# EAGLE board ultimate_Co-Op_v1_0 (EAGLE 7.4.0)
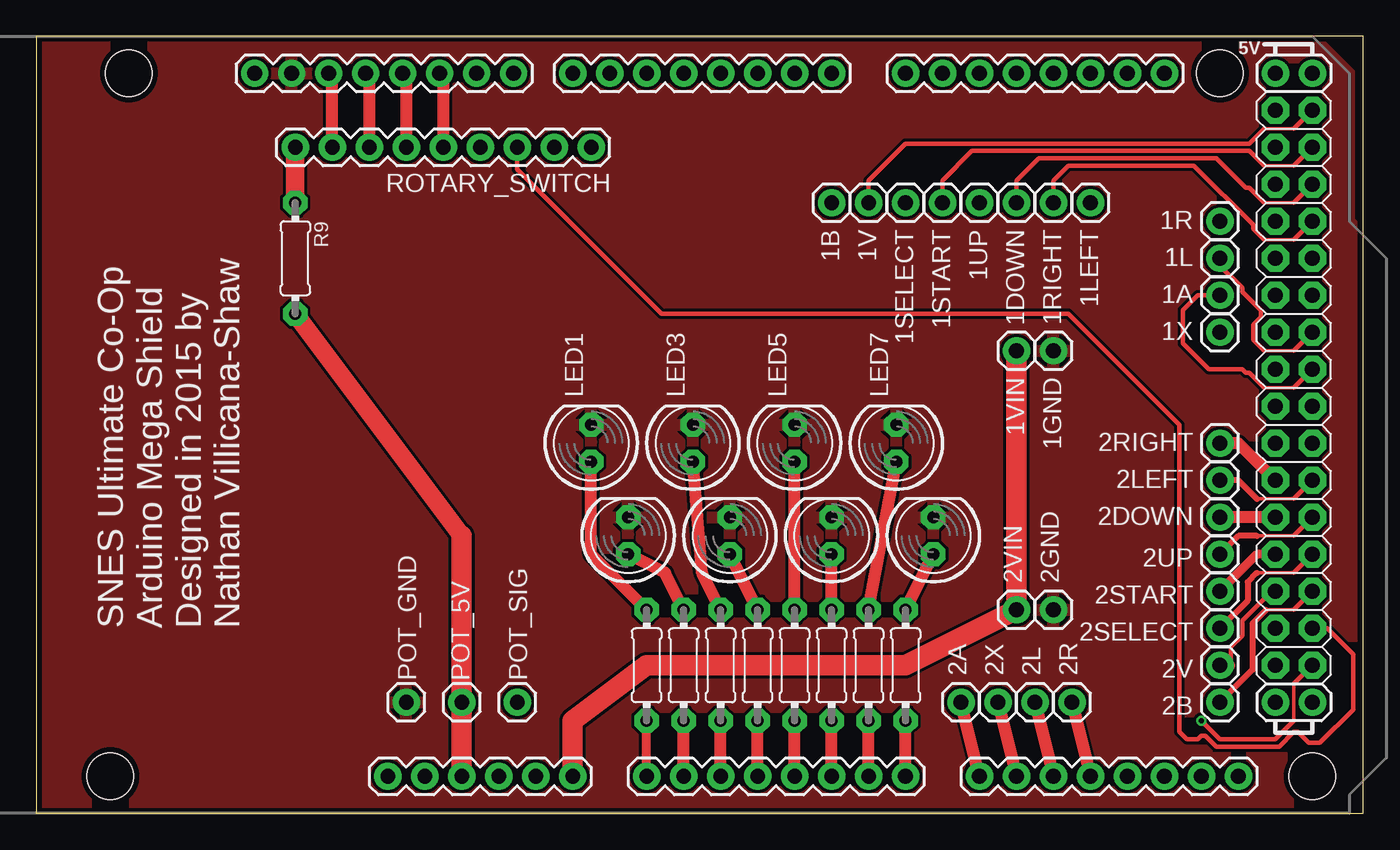
[diagram p0: board, top side]
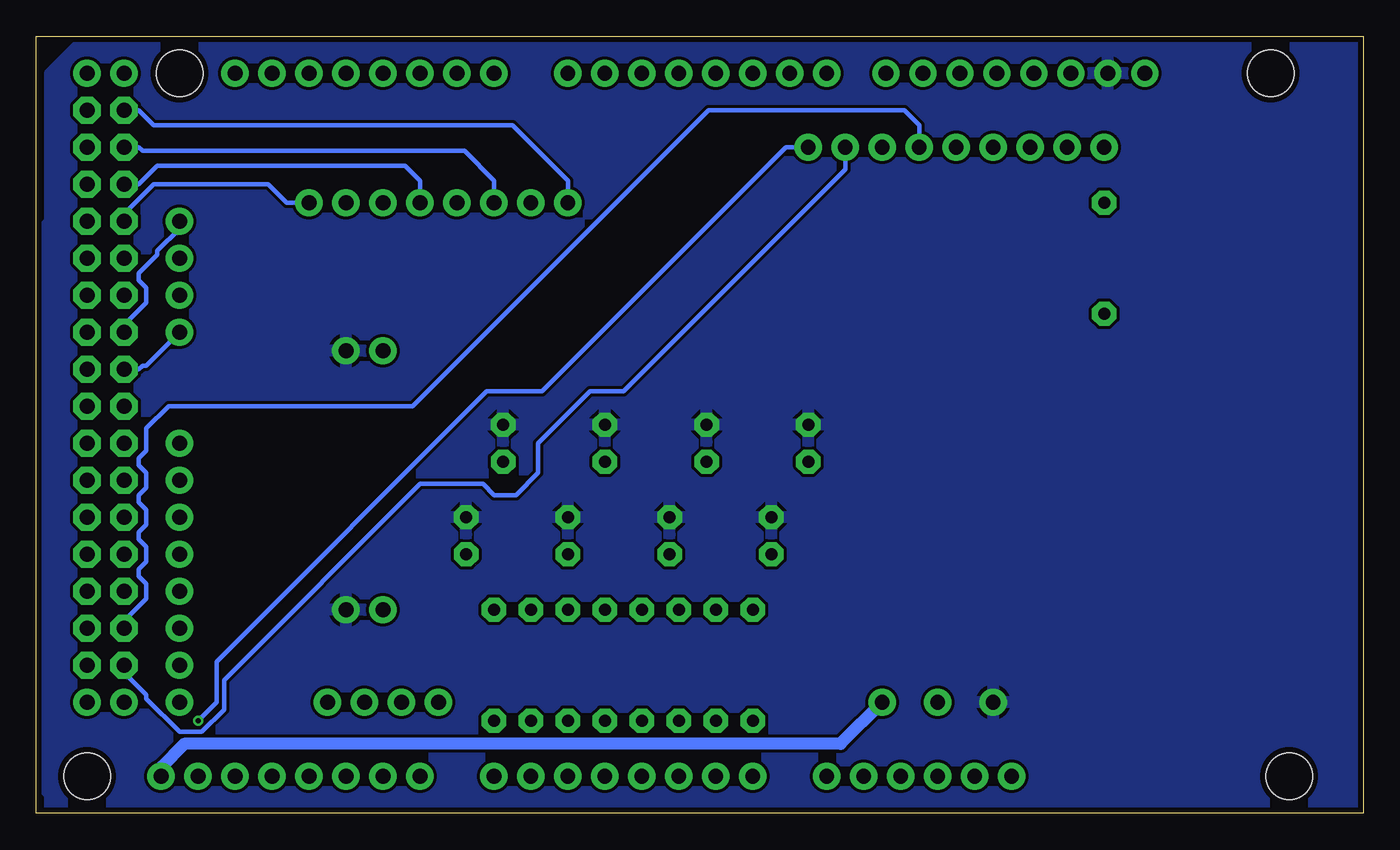
[diagram p1: board, bottom side, seen from below]

Size 91.11 x 53.33 mm. Coordinates in mm from the lower left corner, seen from the top.
Outline: 0,0 91.11,0 91.11,53.33 0,53.33 0,0
Copper layers (1*16): Top 0.0356mm / dielectric 1.5011mm / Bottom 0.0356mm
Design rules "LaenPCBOrder": minimum track width 6mil, minimum drill 13mil, track to track 6mil, track to pad 6mil, pad to pad 6mil, via to via 6mil, smd to smd 6mil, copper to edge 15mil, drill to drill 6mil, minimum pad ring 7mil, minimum via ring 7mil, stop-mask expansion 3mil, vias tented up to drill 0mil, thermal gap 10mil
Net classes: 0 default: width 0.229 mm, clearance 0.203 mm

## Footprints (pad centres in the part's own frame; a part is rotated, then mirrored left to right if it is on the bottom)
1X01 = drill 1.016 pad 1.88: 1 0,0
ARDUINO_MEGA = drill 1.016 pad 1.88: 0 63.5,50.8; 1 60.96,50.8; 2 58.42,50.8; 3 55.88,50.8; 3.3V 35.56,2.54; 4 53.34,50.8; 5 50.8,50.8; 5V@0 38.1,2.54; 5V@1 93.98,50.8; 5V@2 96.52,50.8; 6 48.26,50.8; 7 45.72,50.8; 8 41.656,50.8; 9 39.116,50.8; 10 36.576,50.8; 11 34.036,50.8; 12 31.496,50.8; 13 28.956,50.8; 14 68.58,50.8; 15 71.12,50.8; 16 73.66,50.8; 17 76.2,50.8; 18 78.74,50.8; 19 81.28,50.8; 20 83.82,50.8; 21 86.36,50.8; A0 50.8,2.54; A1 53.34,2.54; A2 55.88,2.54; A3 58.42,2.54; A4 60.96,2.54; A5 63.5,2.54; A6 66.04,2.54; A7 68.58,2.54; A8 73.66,2.54; A9 76.2,2.54; A10 78.74,2.54; A11 81.28,2.54; A12 83.82,2.54; A13 86.36,2.54; A14 88.9,2.54; A15 91.44,2.54; AREF 23.876,50.8; GND@0 40.64,2.54; GND@1 43.18,2.54; GND@2 93.98,7.62; GND@3 96.52,7.62; GND@4 26.416,50.8; RESET 33.02,2.54; VIN 45.72,2.54 | drill 1.016 pad 1.88 octagon: 22 93.98,48.26; 23 96.52,48.26; 24 93.98,45.72; 25 96.52,45.72; 26 93.98,43.18; 27 96.52,43.18; 28 93.98,40.64; 29 96.52,40.64; 30 93.98,38.1; 31 96.52,38.1; 32 93.98,35.56; 33 96.52,35.56; 34 93.98,33.02; 35 96.52,33.02; 36 93.98,30.48; 37 96.52,30.48; 38 93.98,27.94; 39 96.52,27.94; 40 93.98,25.4; 41 96.52,25.4; 42 93.98,22.86; 43 96.52,22.86; 44 93.98,20.32; 45 96.52,20.32; 46 93.98,17.78; 47 96.52,17.78; 48 93.98,15.24; 49 96.52,15.24; 50 93.98,12.7; 51 96.52,12.7; 52 93.98,10.16; 53 96.52,10.16 | hole 3.2: 15.24,50.8; 13.97,2.54; 90.17,50.8; 96.52,2.54
LED5MM = drill 0.813 pad 1.676 octagon: A -1.27,0; K 1.27,0
0204/7 = drill 0.813 pad 1.676 octagon: 1 -3.81,0; 2 3.81,0
1X09 = drill 1.016 pad 1.88: 1 0,0; 2 2.54,0; 3 5.08,0; 4 7.62,0; 5 10.16,0; 6 12.7,0; 7 15.24,0; 8 17.78,0; 9 20.32,0

## Placement (x,y rotation side)
1A  [1X01]  81.28,35.56 180 top
1B  [1X01]  54.61,41.91 270 top
1DOWN  [1X01]  67.31,41.91 270 top
1GND  [1X01]  69.85,31.75 270 top
1L  [1X01]  81.28,38.1 180 top
1LEFT  [1X01]  72.39,41.91 270 top
1R  [1X01]  81.28,40.64 180 top
1RIGHT  [1X01]  69.85,41.91 270 top
1SELECT  [1X01]  59.69,41.91 270 top
1START  [1X01]  62.23,41.91 270 top
1UP  [1X01]  64.77,41.91 270 top
1V  [1X01]  57.15,41.91 270 top
1VIN  [1X01]  67.31,31.75 270 top
1X  [1X01]  81.28,33.02 180 top
2A  [1X01]  63.5,7.62 0 top
2B  [1X01]  81.28,7.62 180 top
2DOWN  [1X01]  81.28,20.32 180 top
2GND  [1X01]  69.85,13.97 0 top
2L  [1X01]  68.58,7.62 0 top
2LEFT  [1X01]  81.28,22.86 180 top
2R  [1X01]  71.12,7.62 0 top
2RIGHT  [1X01]  81.28,25.4 180 top
2SELECT  [1X01]  81.28,12.7 180 top
2START  [1X01]  81.28,15.24 180 top
2UP  [1X01]  81.28,17.78 180 top
2V  [1X01]  81.28,10.16 180 top
2VIN  [1X01]  67.31,13.97 0 top
2X  [1X01]  66.04,7.62 0 top
ARDUINO_MEGA  ARDUINO-MEGAFULL  [ARDUINO_MEGA]  -8.89,0 0 top
LED1  [LED5MM]  38.1,25.4 90 top
LED2  [LED5MM]  40.64,19.05 90 top
LED3  [LED5MM]  45.09,25.4 90 top
LED4  [LED5MM]  47.62,19.05 90 top
LED5  [LED5MM]  52.07,25.4 90 top
LED6  [LED5MM]  54.61,19.05 90 top
LED7  [LED5MM]  59.05,25.4 90 top
LED8  [LED5MM]  61.59,19.05 90 top
POT_5V  [1X01]  29.21,7.62 180 top
POT_GND  [1X01]  25.4,7.62 0 top
POT_SIG  [1X01]  33.02,7.62 0 top
R1  600  [0204/7]  41.91,10.16 90 top
R2  600  [0204/7]  44.45,10.16 90 top
R3  600  [0204/7]  46.99,10.16 90 top
R4  600  [0204/7]  49.53,10.16 90 top
R5  600  [0204/7]  52.07,10.16 90 top
R6  600  [0204/7]  54.61,10.16 90 top
R7  600  [0204/7]  57.15,10.16 90 top
R8  600  [0204/7]  59.69,10.16 90 top
R9  10k  [0204/7]  17.78,38.1 270 top
ROTARY_SWITCH  [1X09]  38.1,45.72 180 top

## Library data of the parts
1A 1B 1DOWN 1GND 1L 1LEFT 1R 1RIGHT 1SELECT 1START 1UP 1V 1VIN 1X 2A 2B 2DOWN 2GND 2L 2LEFT 2R 2RIGHT 2SELECT 2START 2UP 2V 2VIN 2X POT_5V POT_GND POT_SIG ROTARY_SWITCH = SparkFun-Connectors
ARDUINO_MEGA = SparkFun-Boards
LED1-LED8 R1-R9 = adafruit

## Nets
5V: ARDUINO_MEGA.5V@0 POT_5V.1 R9.2
GND: 1GND.1 2GND.1 ARDUINO_MEGA.GND@4 LED1.K LED2.K LED3.K LED4.K LED5.K LED6.K LED7.K LED8.K POT_GND.1
LED1: ARDUINO_MEGA.A0 R1.1
LED2: ARDUINO_MEGA.A1 R2.1
LED3: ARDUINO_MEGA.A2 R3.1
LED4: ARDUINO_MEGA.A3 R4.1
LED5: ARDUINO_MEGA.A4 R5.1
LED6: ARDUINO_MEGA.A5 R6.1
LED7: ARDUINO_MEGA.A6 R7.1
LED8: ARDUINO_MEGA.A7 R8.1
N$1: LED1.A R1.2
N$2: LED2.A R2.2
N$3: LED3.A R3.2
N$4: LED4.A R4.2
N$5: LED5.A R5.2
N$6: LED6.A R6.2
N$7: LED7.A R7.2
N$8: LED8.A R8.2
OIJNENLK: R9.1 ROTARY_SWITCH.9
OUT1_A: 1A.1 ARDUINO_MEGA.37
OUT1_B: 1B.1 ARDUINO_MEGA.22
OUT1_DOWN: 1DOWN.1 ARDUINO_MEGA.27
OUT1_L: 1L.1 ARDUINO_MEGA.35
OUT1_LEFT: 1LEFT.1 ARDUINO_MEGA.28
OUT1_R: 1R.1 ARDUINO_MEGA.34
OUT1_RIGHT: 1RIGHT.1 ARDUINO_MEGA.29
OUT1_SELECT: 1SELECT.1 ARDUINO_MEGA.24
OUT1_START: 1START.1 ARDUINO_MEGA.25
OUT1_UP: 1UP.1 ARDUINO_MEGA.26
OUT1_X: 1X.1 ARDUINO_MEGA.36
OUT1_Y: 1V.1 ARDUINO_MEGA.23
OUT2_A: 2A.1 ARDUINO_MEGA.A8
OUT2_B: 2B.1 ARDUINO_MEGA.49
OUT2_DOWN: 2DOWN.1 ARDUINO_MEGA.44
OUT2_L: 2L.1 ARDUINO_MEGA.A10
OUT2_LEFT: 2LEFT.1 ARDUINO_MEGA.43
OUT2_R: 2R.1 ARDUINO_MEGA.A11
OUT2_RIGHT: 2RIGHT.1 ARDUINO_MEGA.42
OUT2_SELECT: 2SELECT.1 ARDUINO_MEGA.47
OUT2_START: 2START.1 ARDUINO_MEGA.46
OUT2_UP: 2UP.1 ARDUINO_MEGA.45
OUT2_X: 2X.1 ARDUINO_MEGA.A9
OUT2_Y: 2V.1 ARDUINO_MEGA.48
POT1: ARDUINO_MEGA.A15 POT_SIG.1
ROTARY_1: ARDUINO_MEGA.53 ROTARY_SWITCH.1
ROTARY_2: ARDUINO_MEGA.52 ROTARY_SWITCH.2
ROTARY_3: ARDUINO_MEGA.51 ROTARY_SWITCH.3
ROTARY_4: ARDUINO_MEGA.50 ROTARY_SWITCH.4
ROTARY_5: ARDUINO_MEGA.10 ROTARY_SWITCH.5
ROTARY_6: ARDUINO_MEGA.11 ROTARY_SWITCH.6
ROTARY_7: ARDUINO_MEGA.12 ROTARY_SWITCH.7
ROTARY_8: ARDUINO_MEGA.13 ROTARY_SWITCH.8
VIN: 1VIN.1 2VIN.1 ARDUINO_MEGA.VIN

## Tracks (layer width: path | path; a pad name or v marks a point on that pad's centre or on a via)
5V
  Top 1.27: R9.2 29.21,19.05
  Top 1.422: 29.21,19.05 POT_5V.1 ARDUINO_MEGA.5V@0
GND
  pour Top: 0,0 90.17,0 90.17,1.27 92.71,3.81 92.71,38.1 90.17,40.64 90.17,50.8 87.63,53.34 0,53.34
  pour Bottom: 0,53.34 0,0 90.17,0 90.17,1.27 92.71,3.81 92.71,38.1 90.17,40.64 90.17,50.8 87.63,53.34
LED1
  Top 0.61: ARDUINO_MEGA.A0 R1.1
LED2
  Top 0.813: ARDUINO_MEGA.A1 R2.1
LED3
  Top 0.813: ARDUINO_MEGA.A2 R3.1
LED4
  Top 0.813: ARDUINO_MEGA.A3 R4.1
LED5
  Top 0.813: ARDUINO_MEGA.A4 R5.1
LED6
  Top 0.813: ARDUINO_MEGA.A5 R6.1
LED7
  Top 0.813: ARDUINO_MEGA.A6 R7.1
LED8
  Top 0.813: ARDUINO_MEGA.A7 R8.1
N$1
  Top 0.813: R1.2 38.1,17.78 LED1.A
N$2
  Top 0.813: R2.2 43.18,16.51 LED2.A
N$3
  Top 0.813: R3.2 45.72,16.51 LED3.A
N$4
  Top 0.813: R4.2 LED4.A
N$5
  Top 0.813: R5.2 LED5.A
N$6
  Top 0.813: R6.2 LED6.A
N$7
  Top 0.813: R7.2 LED7.A
N$8
  Top 0.813: R8.2 LED8.A
OIJNENLK
  Top 1.27: R9.1 ROTARY_SWITCH.9
OUT1_A
  Top 0.254: 86.36,29.21 84.33,29.21
  Top 0.305: ARDUINO_MEGA.37 86.36,29.21 | 1A.1 79.76,35.56 78.74,34.54 78.74,32.26 80.52,30.48 82.8,30.48 83.06,30.23 83.31,30.23 84.33,29.21
OUT1_B
  Bottom 0.305: 1B.1 54.61,43.43 58.42,47.24 83.06,47.24 84.07,48.26 ARDUINO_MEGA.22
OUT1_DOWN
  Top 0.254: 86.36,41.91 84.33,41.91
  Top 0.305: ARDUINO_MEGA.27 86.36,41.91 | 1DOWN.1 67.31,43.43 68.83,44.96 81.03,44.96 83.06,42.93 83.31,42.93 84.33,41.91
OUT1_L
  Top 0.254: 86.36,31.75 84.33,31.75
  Top 0.305: ARDUINO_MEGA.35 86.36,31.75 | 1L.1 81.28,37.59 82.8,36.07 82.8,35.81 84.07,34.54 84.07,34.04 83.57,33.53 83.57,32.51 84.33,31.75
OUT1_LEFT
  Bottom 0.305: 1LEFT.1 73.91,41.91 75.18,43.18 83.06,43.18 85.09,41.15 ARDUINO_MEGA.28
OUT1_R
  Bottom 0.305: ARDUINO_MEGA.34 85.09,33.53 83.57,35.05 83.57,36.07 84.07,36.58 84.07,37.08 82.8,38.35 82.8,38.61 81.28,40.13 1R.1
OUT1_RIGHT
  Top 0.254: 86.36,39.37 84.33,39.37
  Top 0.305: ARDUINO_MEGA.29 86.36,39.37 | 1RIGHT.1 69.85,43.43 70.87,44.45 79.5,44.45 83.57,40.39 83.57,40.13 84.33,39.37
OUT1_SELECT
  Bottom 0.305: 1SELECT.1 59.69,43.43 61.72,45.47 83.82,45.47 84.07,45.72 ARDUINO_MEGA.24
OUT1_START
  Top 0.254: 86.36,44.45 84.33,44.45
  Top 0.305: ARDUINO_MEGA.25 86.36,44.45 | 1START.1 62.23,43.43 64.26,45.47 83.31,45.47 84.33,44.45
OUT1_UP
  Bottom 0.305: 1UP.1 64.77,43.43 65.79,44.45 82.8,44.45 84.07,43.18 ARDUINO_MEGA.26
OUT1_X
  Bottom 0.305: 1X.1 83.57,30.73 83.82,30.73 84.07,30.48 ARDUINO_MEGA.36
OUT1_Y
  Top 0.254: 86.36,46.99 84.33,46.99
  Top 0.305: ARDUINO_MEGA.23 86.36,46.99 | 1V.1 57.15,43.43 59.69,45.97 83.31,45.97 84.33,46.99
OUT2_A
  Top 0.813: ARDUINO_MEGA.A8 2A.1
OUT2_B
  Top 0.254: 86.36,13.97 84.45,13.97
  Top 0.305: ARDUINO_MEGA.49 86.36,13.97
  Top 0.406: 84.45,13.97 83.5,13.02 83.5,9.84 2B.1
OUT2_DOWN
  Top 0.813: ARDUINO_MEGA.44 2DOWN.1
OUT2_L
  Top 0.813: 2L.1 ARDUINO_MEGA.A10
OUT2_LEFT
  Top 0.254: 86.36,21.59 83.82,21.59
  Top 0.305: ARDUINO_MEGA.43 86.36,21.59
  Top 0.406: 83.82,21.59 82.55,22.86 2LEFT.1
OUT2_R
  Top 0.813: 2R.1 ARDUINO_MEGA.A11
OUT2_RIGHT
  Top 0.813: ARDUINO_MEGA.42 82.55,25.4 2RIGHT.1
OUT2_SELECT
  Top 0.254: 86.36,16.51 83.82,16.51
  Top 0.305: ARDUINO_MEGA.47 86.36,16.51
  Top 0.406: 83.82,16.51 83.19,15.88 83.19,14.61 2SELECT.1
OUT2_START
  Top 0.61: ARDUINO_MEGA.46 83.82,17.78 2START.1
OUT2_UP
  Top 0.254: 86.36,19.05 83.82,19.05
  Top 0.305: ARDUINO_MEGA.45 86.36,19.05
  Top 0.406: 83.82,19.05 82.55,19.05 2UP.1
OUT2_X
  Top 0.813: 2X.1 ARDUINO_MEGA.A9
OUT2_Y
  Top 0.305: ARDUINO_MEGA.48 84.84,15.24 82.8,13.21 82.8,12.19 82.04,11.43 82.04,10.41 2V.1
  Top 0.813: 81.92,10.16 2V.1
POT1
  Bottom 0.813: POT_SIG.1 35.88,4.76 80.96,4.76 82.55,3.17 ARDUINO_MEGA.A15
ROTARY_1  (via drill 0.33)
  Top 0.254: 86.36,8.89 86.36,6.35
  Top 0.305: ARDUINO_MEGA.53 86.36,8.89 | 86.36,6.35 85.09,5.08 81.28,5.08 v80.01,6.35
  Bottom 0.305: ROTARY_SWITCH.1 39.62,45.72 56.39,28.96 60.2,28.96 78.74,10.41 78.74,7.62 v80.01,6.35
ROTARY_2
  Bottom 0.305: ROTARY_SWITCH.2 35.56,44.2 50.8,28.96 53.09,28.96 56.64,25.4 56.64,23.37 58.17,21.84 59.69,21.84 60.45,22.61 64.77,22.61 78.23,9.14 78.23,7.11 79.76,5.59 81.28,5.59 83.57,7.87 83.57,8.13 85.09,9.65 ARDUINO_MEGA.52
ROTARY_3
  Top 0.305: ROTARY_SWITCH.3 33.02,44.2 42.93,34.29 70.87,34.29 78.49,26.67 78.49,5.59 78.99,5.08 79.76,5.08 80.01,5.33 80.26,5.33 81.03,4.57 85.34,4.57 86.36,5.59 86.61,5.59 87.38,4.83 88.14,4.83 90.42,7.11 90.42,10.92 88.65,12.7 ARDUINO_MEGA.51
ROTARY_4
  Bottom 0.305: ROTARY_SWITCH.4 30.48,47.24 31.5,48.26 44.96,48.26 65.28,27.94 82.04,27.94 83.57,26.42 83.57,24.89 84.07,24.38 84.07,23.88 83.57,23.37 83.57,22.35 84.07,21.84 84.07,21.34 83.57,20.83 83.57,19.81 84.07,19.3 84.07,18.8 83.57,18.29 83.57,17.27 84.07,16.76 84.07,16.26 83.57,15.75 83.57,14.73 85.09,13.21 ARDUINO_MEGA.50
ROTARY_5
  Top 0.305: ARDUINO_MEGA.10 27.94,50.8
  Top 0.813: 27.94,50.8 ROTARY_SWITCH.5
ROTARY_6
  Top 0.305: ARDUINO_MEGA.11 25.4,50.8
  Top 0.813: 25.4,50.8 ROTARY_SWITCH.6
ROTARY_7
  Top 0.305: ARDUINO_MEGA.12 22.86,50.8
  Top 0.813: 22.86,50.8 ROTARY_SWITCH.7
ROTARY_8
  Top 0.305: ARDUINO_MEGA.13 20.32,50.8
  Top 0.813: ROTARY_SWITCH.8 20.32,50.8
VIN
  Top 1.422: 1VIN.1 2VIN.1 59.69,10.16 41.91,10.16 36.83,6.35 ARDUINO_MEGA.VIN

## Text on the board
tNames: SNES Ultimate Co-Op / Arduino Mega Shield / Designed in 2015 by / Nathan Villicana-Shaw